# Altium PCB PCB2.PcbDoc
Units mil, origin at the board's own origin, x right, y up, seen from the top; angles counter-clockwise.
Board outline 7000 x 5000 mil, 4 copper layers (Top Layer, Internal Plane 1, Internal Plane 2, Bottom Layer), stack 18.2 mil thick; 35 components, 27 nets, 113 pads, 0 vias.
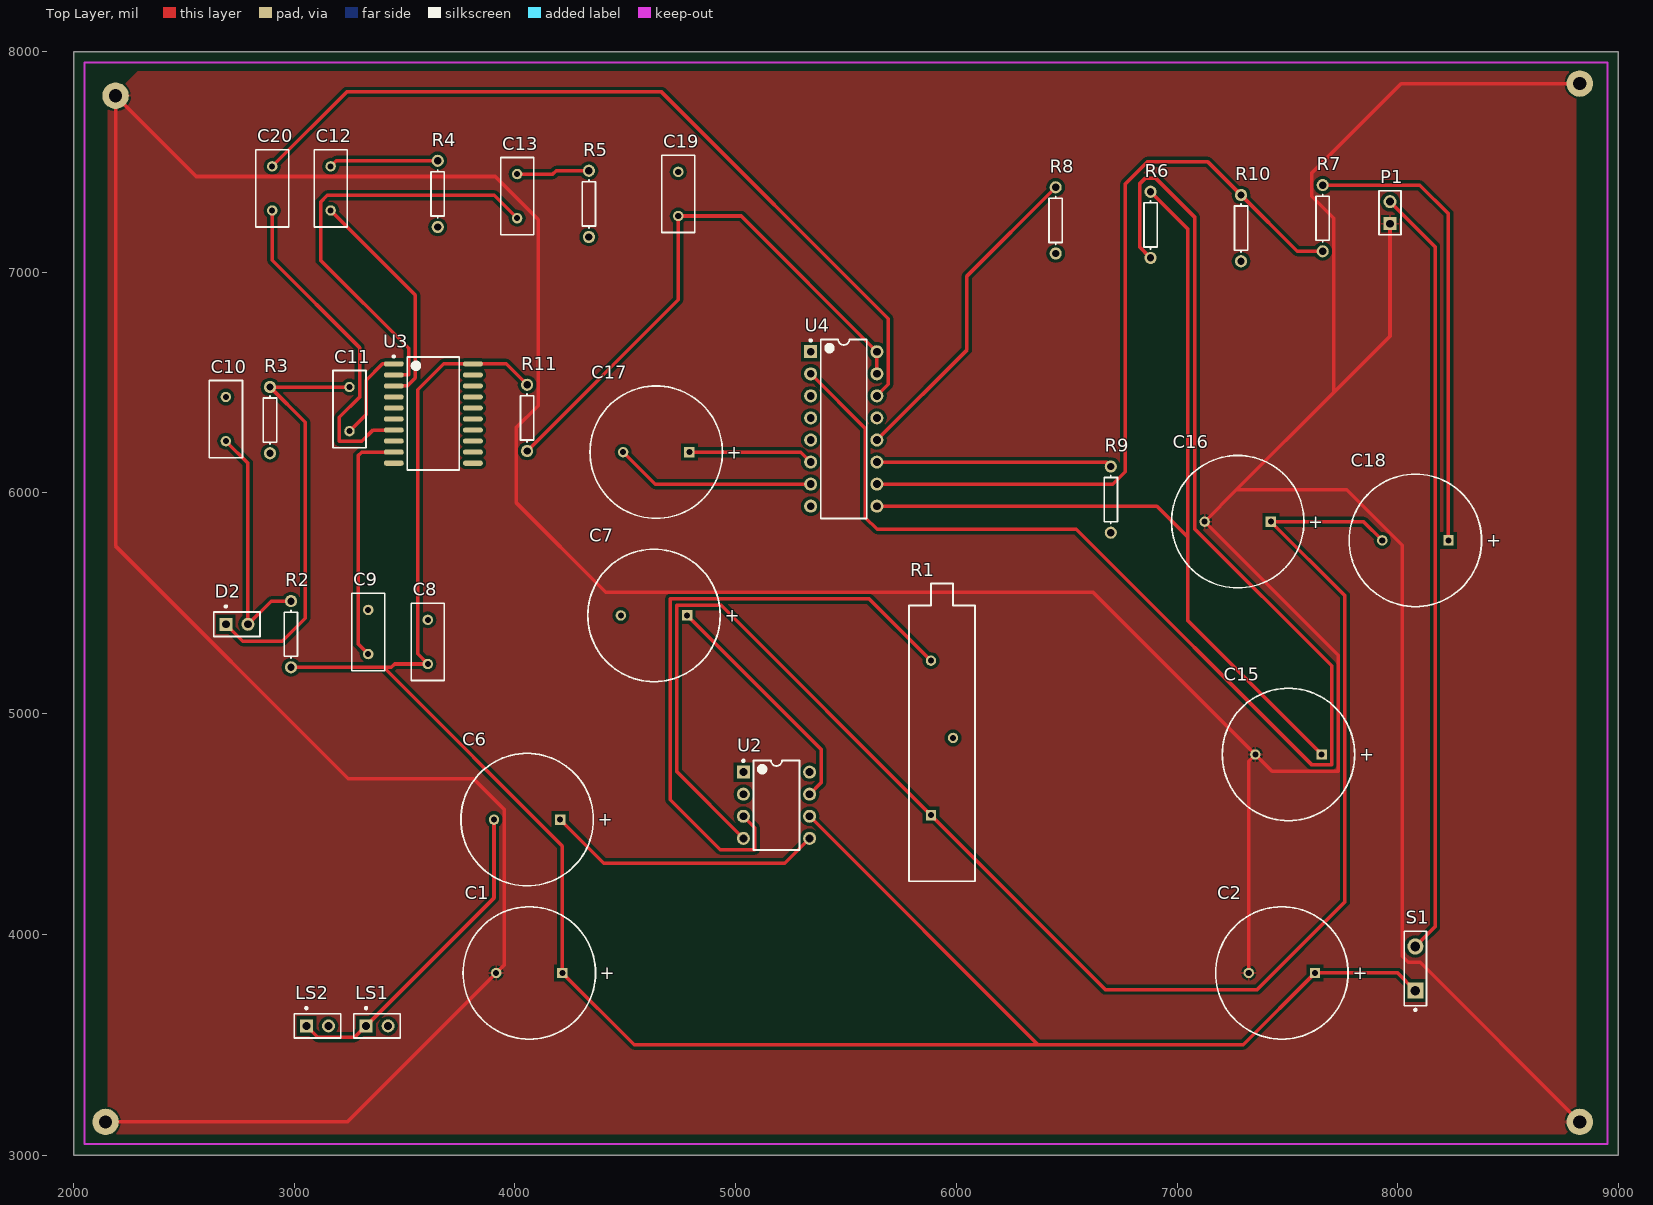
[diagram p0: Top Layer view]
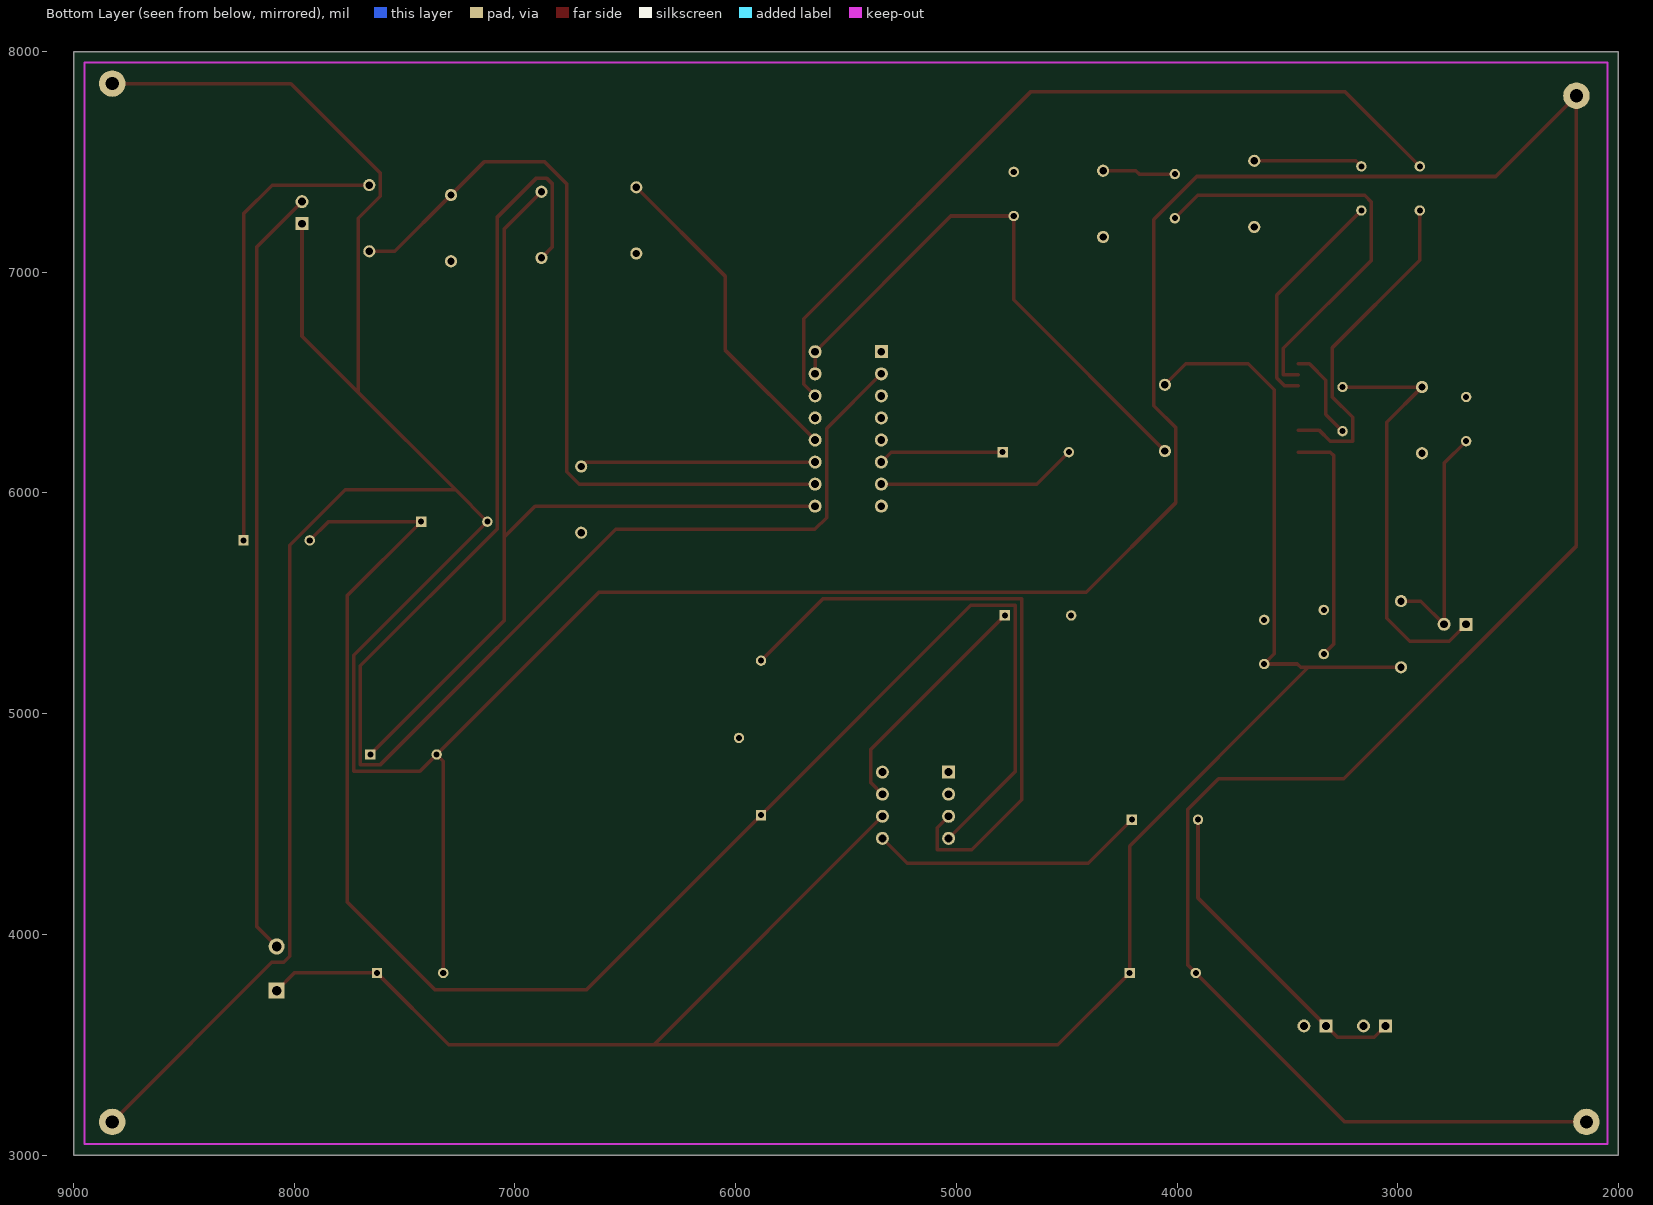
[diagram p1: Bottom Layer view, seen from below]
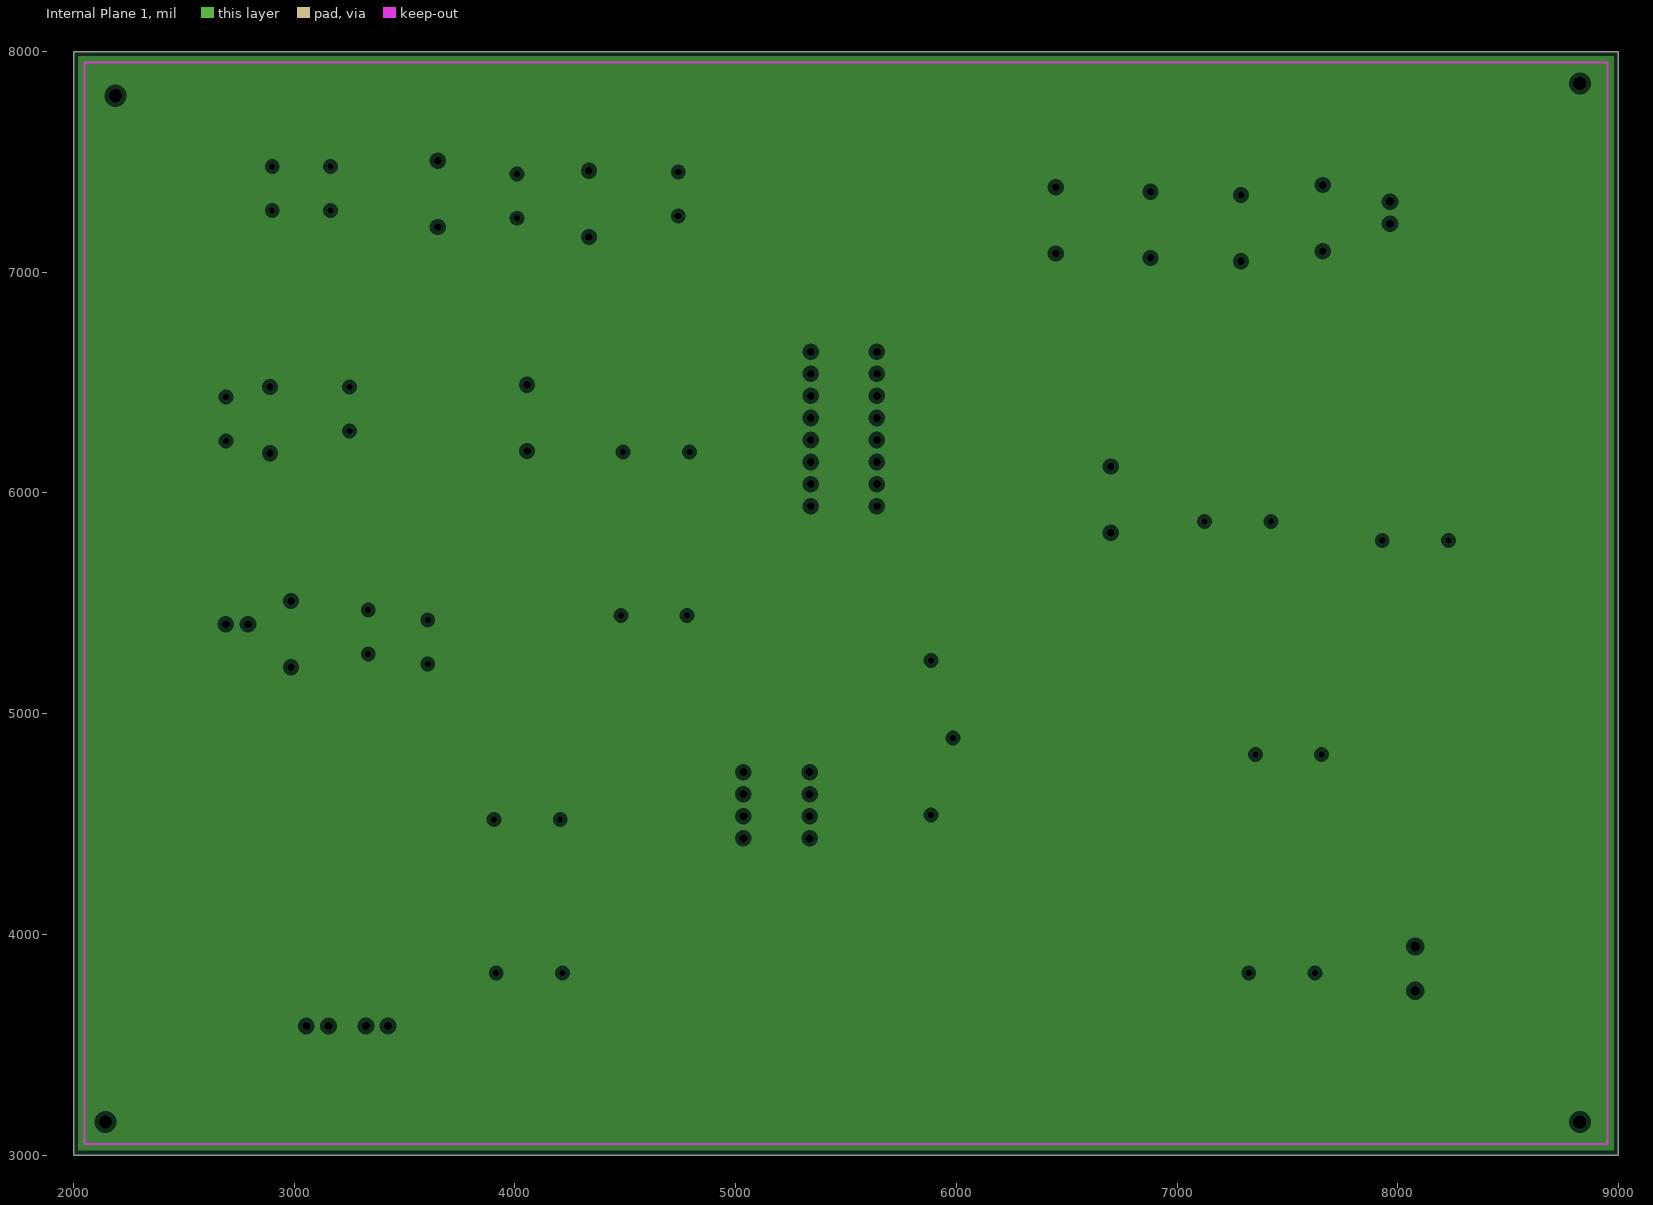
[diagram p2: Internal Plane 1, clearances drawn from the general rule]
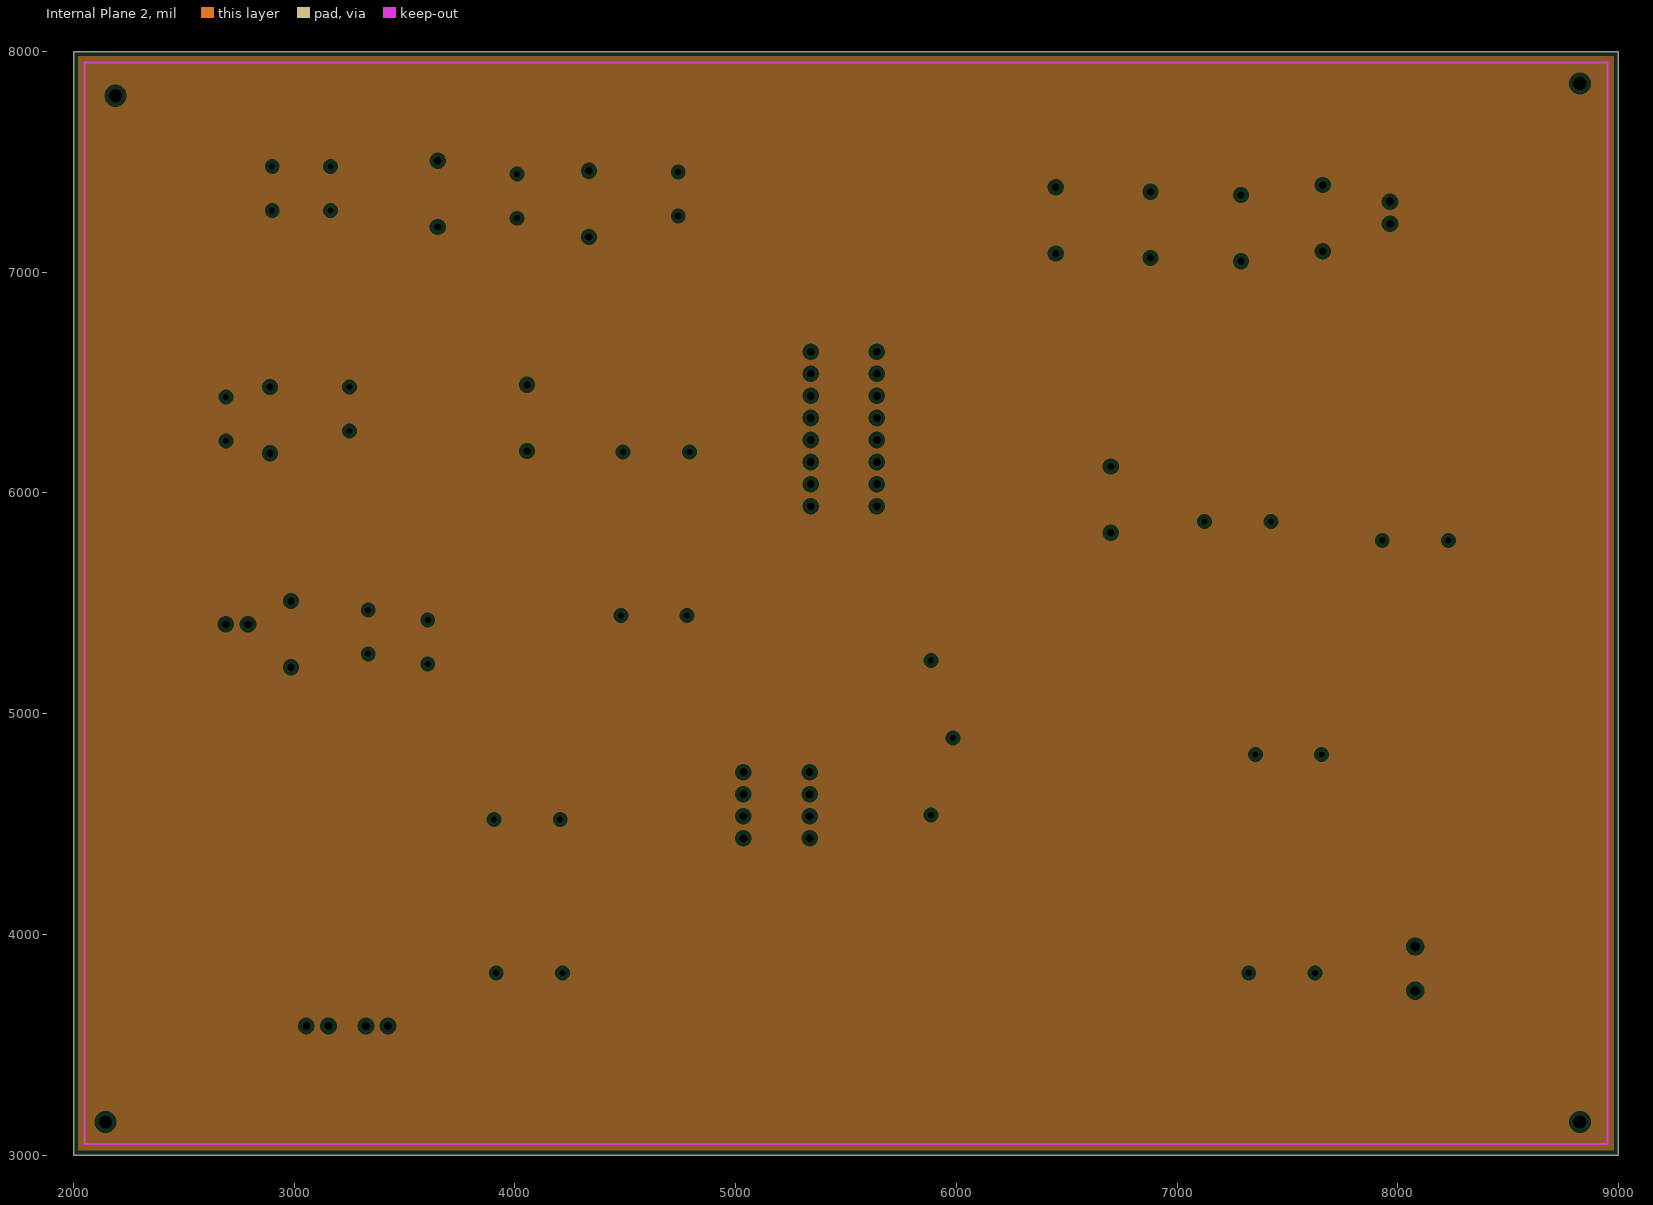
[diagram p3: Internal Plane 2, clearances drawn from the general rule]

## Layer stack, top to bottom
Top Solder: solder mask 0.4, Solder Resist, Dk 3.5
Top Layer: signal copper 1.4
Internal Plane 1: plane copper 1.4
Internal Plane 2: plane copper 1.4
Dielectric 1: dielectric 12.6, FR-4, Dk 4.8
Bottom Layer: signal copper 1.4
Bottom Solder: solder mask 0.4, Solder Resist, Dk 3.5

## Board outline
2000,3000 9000,3000 9000,8000 2000,8000

## Design rules (kind name [scope] priority, off if disabled: settings)
Clearance [All] p1: gap=14 ignorepadtopadclearanceinfootprint=FALSE
PlaneClearance [All] p1: clearance=20
PlaneConnect [All] p1: planeconnectstyle=Relief reliefexpansion=20 reliefentries=4 reliefconductorwidth=10 reliefairgap=10
PolygonConnect [All] p1: connectstyle=Relief reliefconductorwidth=10 reliefentries=4 polygonreliefangle="90 Angle" airgapwidth=10
RoutingVias [All] p1: holewidth=32 width=80 viastyle="Through Hole" minholewidth=28 minwidth=50 maxholewidth=28 maxwidth=50
SolderMaskExpansion [All] p1: expansion=4
Width [All] p1: maxlimit=16 minlimit=16 preferedwidth=16
28 further rules are at their usual default settings.

## Classes and differential pairs
component class PLL: C15 C16 C17 C18 R6 R7 R8 R9 R10 U4
component class M3005: C8 C9 C10 C11 C12 C13 C19 C20 D2 R2 R3 R4 R5 R11 U3
component class loud: LS1 LS2
component class LM386: C6 C7 R1 U2
component class BLOCINT: C1 C2 P1 S1

## Components (designator, comment, footprint, x,y, rotation, side; value= is the part's Value field where it differs from the comment)
C1 "Cap2" RB7.6-15 4065,3825 r0 top value=100pF
C2 "Cap2" RB7.6-15 7475,3825 r0 top value=100pF
C6 "Cap2" RB7.6-15 4055,4520 r0 top value=100pF
C7 "Cap2" RB7.6-15 4630,5445 r0 top value=10pF
C8 "Cap2" RAD-0.2 3605,5325 r90 top value=100pF
C9 "Cap2" RAD-0.2 3335,5370 r90 top value=100pF
C10 "Cap2" RAD-0.2 2690,6335 r90 top value=100pF
C11 "Cap2" RAD-0.2 3250,6380 r90 top value=100pF
C12 "Cap2" RAD-0.2 3165,7380 r90 top value=100pF
C13 "Cap2" RAD-0.2 4010,7345 r90 top value=100pF
C15 "Cap2" RB7.6-15 7505,4815 r0 top value=100pF
C16 "Cap2" RB7.6-15 7275,5870 r0 top value=100pF
C17 "Cap2" RB7.6-15 4640,6185 r0 top value=100pF
C18 "Cap2" RB7.6-15 8080,5785 r0 top value=100pF
C19 "Cap2" RAD-0.2 4740,7355 r90 top value=100pF
C20 "Cap2" RAD-0.2 2900,7380 r90 top value=100pF
D2 "Fil-3C" PIN2 2690,5405 r0 top
LS1 "Speaker" PIN2 3325,3585 r0 top
LS2 "Speaker" PIN2 3055,3585 r0 top
P1 "Header 2" HDR1X2 7965,7220 r90 top
R1 "Res Tap" VR3 5935,4890 r90 top value=1K
R2 "Res1" AXIAL-0.3 2985,5360 r90 top value=1K
R3 "Res1" AXIAL-0.3 2890,6330 r90 top value=1K
R4 "Res1" AXIAL-0.3 3650,7355 r90 top value=1K
R5 "Res1" AXIAL-0.3 4335,7310 r90 top value=1K
R6 "Res1" AXIAL-0.3 6880,7215 r90 top value=1K
R7 "Res1" AXIAL-0.3 7660,7245 r90 top value=1K
R8 "Res1" AXIAL-0.3 6450,7235 r90 top value=1K
R9 "Res1" AXIAL-0.3 6700,5970 r90 top value=1K
R10 "Res1" AXIAL-0.3 7290,7200 r90 top value=1K
R11 "Res1" AXIAL-0.3 4055,6340 r90 top value=1K
S1 "SW-SPST" SPST-2 8080,3845 r90 top
U2 "LM386N-4/NOPB" N08E 5185,4585 r0 top
U3 "M3005LD" SO20_N 3630,6360 r0 top
U4 "CD4046BCN" N16E 5490,6290 r0 top

## Footprints (in the part's own frame and the unit in brackets; to place one, negate y for a bottom-side part, rotate by r counter-clockwise, add the part's x,y. Pads: shape width x height; smd on the part's side, far side on the other; paste and mask are expansions set on the pad)
AXIAL-0.3 [mm] "Axial Device, Thru-Hole; 2 Leads; 0.3 in Pin Spacing"
  round 1.4 hole 0.85: 1(-3.81,0) 2(3.81,0)
  silkscreen extent -2.77,-0.76 2.77,0.76
HDR1X2 [mm] "Connector; Header; 2 Position"
  rect 1.5x1.5 hole 0.9: 1(0,0)
  round 1.5 hole 0.9: 2(2.54,0)
  silkscreen extent -1.27,-1.27 3.81,1.27
N08E [mm] "DIP, 8-Leads, Row Spacing 7.62mm, Pitch 2.54mm, Body 9.91x6.35mm"
  rect 1.5x1.5 hole 0.9: 1(-3.81,3.81)
  round 1.5 hole 0.9: 2(-3.81,1.27) 3(-3.81,-1.27) 4(-3.81,-3.81) 5(3.81,-3.81) 6(3.81,-1.27) 7(3.81,1.27) 8(3.81,3.81)
  silkscreen extent -3.93,-5.15 2.65,5.23, body extent -3.6,-5.15 3.6,5.15, height 5.34
N16E [mm] "DIP, 16-Leads, Row Spacing 7.62mm, Pitch 2.54mm, Body 19.3x6.35mm"
  rect 1.5x1.5 hole 0.9: 1(-3.81,8.89)
  round 1.5 hole 0.9: 2(-3.81,6.35) 3(-3.81,3.81) 4(-3.81,1.27) 5(-3.81,-1.27) 6(-3.81,-3.81) 7(-3.81,-6.35) 8(-3.81,-8.89) 9(3.81,-8.89) 10(3.81,-6.35) 11(3.81,-3.81) 12(3.81,-1.27) 13(3.81,1.27) 14(3.81,3.81) 15(3.81,6.35) 16(3.81,8.89)
  silkscreen extent -3.93,-10.3 2.65,10.31, body extent -3.6,-10.28 3.6,10.28, height 5.08
PIN2 [mm] "Photosensitive Diode; 2 Leads"
  rect 1.5x1.5 hole 0.9: 1(0,0)
  round 1.5 hole 0.9: 2(2.54,0)
  silkscreen extent -1.4,-1.4 3.94,2.17
RAD-0.2 [mm] "Radial Cap, Thru-Hole; 2 Leads; 0.2 in Pin Spacing"
  round 1.2 hole 0.7: 1(-2.54,0) 2(2.54,0)
  silkscreen extent -4.44,-1.91 4.44,1.91
RB7.6-15 [mm] "Polarized Capacitor (Radial); 2 Leads"
  rect 1.2x1.2 hole 0.7: 1(3.81,0)
  round 1.2 hole 0.7: 2(-3.81,0)
  silkscreen extent -7.62,-7.62 7.62,7.62
SO20_N [mm] "SOIC, 20-Leads, Body 12.8x7.5mm, Pitch 1.27mm, IPC Medium Density"
  oval 2.3x0.6 smd: 1(-4.55,5.715) 2(-4.55,4.445) 3(-4.55,3.175) 4(-4.55,1.905) 5(-4.55,0.635) 6(-4.55,-0.635) 7(-4.55,-1.905) 8(-4.55,-3.175) 9(-4.55,-4.445) 10(-4.55,-5.715) 11(4.55,-5.715) 12(4.55,-4.445) 13(4.55,-3.175) 14(4.55,-1.905) 15(4.55,-0.635) 16(4.55,0.635) 17(4.55,1.905) 18(4.55,3.175) 19(4.55,4.445) 20(4.55,5.715)
  silkscreen extent -4.67,-6.5 3,6.69, body extent -3.75,-6.4 3.75,6.4, height 2.65
SPST-2 [mm] "Switch; 2 Leads"
  rect 1.85x1.85 hole 1.1: 1(-2.54,0)
  round 1.85 hole 1.1: 2(2.54,0)
  silkscreen extent -4.89,-1.27 4.28,1.27
VR3 [mm] "Thru-Hole; 3 Leads"
  rect 1.2x1.2 hole 0.7: 1(-8.89,1.27)
  round 1.2 hole 0.7: 2(0,-1.27) 3(8.89,1.27)
  silkscreen extent -16.51,-3.81 17.78,3.81

## Part data
C1 C2 C6 C7 C8 C9 C10 C11 C12 C13 C15 C16 C17 C18 C19 C20: "Capacitor", PackageDescription="Capacitor; 2 Leads", PackageReference=CAPR5-4X5, Published=23-Sep-2002, Publisher="Altium Limited"
D2: library part "Photo Sen", "Photosensitive Diode", LatestRevisionDate=17-Jul-2002, LatestRevisionNote="Re-released for DXP Platform.", PackageReference=PIN2, Published=24-Mar-1999, Publisher="Altium Limited"
LS1 LS2: "Loudspeaker", LatestRevisionDate=17-Jul-2002, LatestRevisionNote="Re-released for DXP Platform.", PackageReference=PIN2, Published=24-Mar-1999, Publisher="Altium Limited"
P1: "Header, 2-Pin", LatestRevisionDate=17-Jul-2002, LatestRevisionNote="Re-released for DXP Platform.", Publisher="Altium Limited"
R1: "Tapped Resistor", LatestRevisionDate=17-Jul-2002, LatestRevisionNote="Re-released for DXP Platform.", PackageDescription="Variable Resistor, Thru-Hole; 3 Leads", PackageReference=VR3, Published=24-Mar-1999, Publisher="Altium Limited", Set Position=0.5, Sim Note="Enter the Resistance value and the set point into parameter fields."
R2 R3 R4 R5 R6 R7 R8 R9 R10 R11: "Resistor", LatestRevisionDate=17-Jul-2002, LatestRevisionNote="Re-released for DXP Platform.", PackageDescription="Axial Device, Thru-Hole; 2 Leads; 0.3 in Pin Spacing", PackageReference=AXIAL-0.3, Published=8-Jun-2000, Publisher="Altium Limited"
S1: "Single-Pole, Single-Throw Switch", LatestRevisionDate=17-Jul-2002, LatestRevisionNote="Re-released for DXP Platform.", PackageDescription="Switch; 2 Leads", PackageReference=SPST-2, Published=24-Mar-1999, Publisher="Altium Limited"
U2: "Low Voltage Audio Power Amplifier, 8-pin MDIP, Pb-Free", Manufacturer="National Semiconductor", PackageTopMarking=NSUZXYTTE#*LM*386N-4, PowerWise=N, Supplier Part Number 1=LM386N-4-ND, Code_JEDEC=MS-001-BA, ComponentLink1Description="LM386 Datasheet", ComponentLink1URL=http://www.national.com/ds/LM/LM386.pdf, ComponentLink2Description="LM386 Web Page", ComponentLink2URL=http://www.national.com/pf/LM/LM386.html, ComponentLink3Description="N08E Package Page", ComponentLink3URL=http://www.national.com/packaging/folders/n08e.html, CompType="Audio IC", DatasheetVersion=Aug-2000, PackageDescription="MDIP, .365 x .250 x .130in, 8 Lead, .100in Pitch", PackageReference=N08E, PackageVersion="revG, May-2006", PartNumber=LM386N-4/NOPB, PinCount=8, Published=1-Mar-2010, Publisher="Altium Limited", RoHS=Y, Supplier 1=Digi-Key, Supplier 2=Farnell, Supplier Part Number 2=1184987
U3: "Remote Control Transmitter", Code_IPC=SOIC127P1030-20, Code_JEDEC=MS-013-AC, ComponentLink1Description="Manufacturer Link", ComponentLink1URL=http://www.st.com/, DatasheetVersion=Jun-1992, LatestRevisionDate=13-Apr-2006, LatestRevisionNote="IPC-7351 Footprint Added.", PackageDescription="20-Pin Plastic Small Outline Integrated Circuit 1.27 mm Pitch", PackageReference=SO20, PackageVersion=Jul-2001, Published=24-Aug-2001, Publisher="Altium Limited"
U4: "Micropower Phase-Locked Loop", ComponentLink1Description="Manufacturer Link", ComponentLink1URL=http://www.fairchildsemi.com/, ComponentLink2Description=Datasheet, ComponentLink2URL=http://www.fairchildsemi.com/ds/CD%2FCD4046BC.pdf, DatasheetVersion=Jan-1999, LatestRevisionDate=04-Mar-2005, LatestRevisionNote="Stylized 3D Model Added.", PackageDescription="DIP, 16-Pin, Row Spacing 7.62 mm, Pitch 2.54 mm", PackageReference=N16E, PackageVersion=2000, Published=17-Jul-2002, Publisher="Altium Limited"

## Free pads (board coordinates)
  round 120 hole 60: 14(2190,7800) 15(8825,7855) 16(8825,3150) 17(2145,3150)

## Nets (pads, with @x,y where several pads share a name; then routed paths per layer and width w, separated by ;. In a path a pad name is that pad's centre, name@x,y a point inside that pad or via, vN(x,y) a via of type N, cw(c..) or ccw(c..) an arc to the next point about the centre after c; other vN are vias at no path point)
GND: C1.2 C2.2 C15.2 C16.2 P1.1 pad.14 pad.15 pad.16 pad.17 | length 25136.5
  Top Layer w16: pad.17 3240,3150 C1.2 3951,3861 3951,4566 3812,4705 3245,4705 2190,5760 pad.14 2556,7434 3910,7434 4105,7239 4105,6396 4005,6296 4005,5957 4411.38,5550.62 6619.38,5550.62 C15.2 ; C2.2 7325,4785 C15.2 ; P1.1 7965,6710 7710,6455 ; pad.16 8102,3873 8047,3873 8020,3900 8020,5763 7769,6014 7269,6014 ; pad.15 8015,7855 7610,7450 7610,7345 7710,7245 7710,6455 ; 7269,6014 C16.2 7730.62,5264.38 7730.62,4739.38 7430.62,4739.38 C15.2 ; 7269,6014 7710,6455
NetC1_1: C1.1 C2.1 C8.1 R2.1 R11.2 S1.1 U2.6 U3.20 | length 9823.3
  Top Layer w16: R2.1 3405,5210 ; R11.2 3960,6585 U3.20 3676.69,6585 3559,6467.31 3559,5271 C8.1 3455,5225 3440,5210 3405,5210 ; U2.6 6370,3500 ; S1.1 8000,3825 C2.1 7300,3500 6370,3500 ; 3405,5210 4215,4400 C1.1 4540,3500 6370,3500
NetC6_1: C6.1 U2.5 | length 1258.8
  Top Layer w16: C6.1 4403,4322 5222,4322 U2.5
NetC6_2: C6.2 LS1.1 LS2.1 | length 1488.3
  Top Layer w16: LS2.1 3107,3533 3273,3533 LS1.1 3905,4165 C6.2
NetC7_1: C7.1 U2.7 | length 1083
  Top Layer w16: C7.1 5387,4838 5387,4687 U2.7
NetC9_1: C9.1 U3.9 | length 1086.5
  Top Layer w16: C9.1 3289,5316 3289,6169 3305,6185 U3.9
NetC10_1: C10.1 D2.2 R2.2 | length 1109.9
  Top Layer w16: C10.1 2790,6135 D2.2 2895,5510 R2.2
NetC11_1: C11.1 U3.1 | length 418
  Top Layer w16: C11.1 3325.62,6355.62 3325.62,6510.62 3400,6585 U3.1
NetC11_2: C11.2 D2.1 R3.2 | length 1908.7
  Top Layer w16: D2.1 2767,5328 2945,5328 3050,5433 3050,6320 R3.2 C11.2
NetC12_1: C12.1 U3.3 | length 1029.8
  Top Layer w16: C12.1 3548.14,6896.86 3548.14,6521.19 3511.95,6485 U3.3
NetC12_2: C12.2 R4.2 | length 495.4
  Top Layer w16: C12.2 3190,7505 R4.2
NetC13_1: C13.1 U3.2 | length 1962.5
  Top Layer w16: U3.2 3518.14,6535 3518.14,6655.86 3119,7055 3119,7318 3150,7349 3906,7349 C13.1
NetC13_2: C13.2 R5.2 | length 331.2
  Top Layer w16: C13.2 4172,7445 4187,7460 R5.2
NetC15_1: C15.1 R6.2 U4.9 | length 4338.5
  Top Layer w16: U4.9 6909,5940 7049.38,5799.62 ; R6.2 7049.38,7195.62 7049.38,5799.62 ; C15.1 7049.38,5420.62 7049.38,5799.62
NetC16_1: C16.1 C18.2 R1.1 U2.4 | length 7495.1
  Top Layer w16: U2.4 4734,4736 4734,5490.62 4934.38,5490.62 R1.1 6675,3750 7364,3750 7761,4147 7761,5534 C16.1 7845,5870 C18.2
NetC17_1: C17.1 U4.6 | length 568.6
  Top Layer w16: C17.1 5295,6185 U4.6
NetC17_2: C17.2 U4.7 | length 910.1
  Top Layer w16: C17.2 4635,6040 U4.7
NetC18_1: C18.1 R7.2 | length 2103.8
  Top Layer w16: R7.2 8100,7395 8230,7265 C18.1
NetC19_1: C19.1 R11.1 U4.15 U4.16 | length 2603.5
  Top Layer w16: R11.1 4740,6875 C19.1 5025,7255 U4.16 U4.15
NetC20_1: C20.1 U3.7 | length 1515.8
  Top Layer w16: C20.1 2900,7054.62 3295.62,6659 3295.62,6434 3204,6342.38 3204,6234 3306,6234 3357,6285 U3.7
NetC20_2: C20.2 U4.14 | length 3727.9
  Top Layer w16: C20.2 3237,7817 4664,7817 5692,6789 5692,6492 U4.14
NetP1_2: P1.2 S1.2 | length 3496.4
  Top Layer w16: P1.2 8169,7116 8169,4034 S1.2
NetR1_3: R1.3 U2.3 | length 2858.4
  Top Layer w16: U2.3 5087,4483 5087,4383 4931,4383 4704,4610 4704,5520.62 5604.38,5520.62 R1.3
NetR6_1: R6.1 U4.2 | length 6756.9
  Top Layer w16: U4.2 5588,6292 5588,5888 5641,5835 6543.38,5835 7609,4769.38 7700.62,4769.38 7700.62,5216.38 7079.38,5837.62 7079.38,7250.62 6905,7425 6855,7425 6830,7400 6830,7115 R6.1
NetR7_1: R7.1 R10.2 U4.10 | length 3556.4
  Top Layer w16: U4.10 6709,6040 6765,6096 6765,7400 6865,7500 7140,7500 R10.2 7545,7095 R7.1
NetR8_2: R8.2 U4.12 | length 1480.5
  Top Layer w16: U4.12 6048,6648 6048,6983 R8.2
NetR9_2: R9.2 U4.11 | length 1068.3
  Top Layer w16: U4.11 6680,6140 R9.2
pads on no net: C7.2 C8.2 C9.2 C10.2 C19.2 LS1.2 LS2.2 R1.2 R3.1 R4.1 R5.1 R8.1 R9.1 R10.1 U2.1 U2.2 U2.8 U3.4 U3.5 U3.6 U3.8 U3.10 U3.11 U3.12 U3.13 U3.14 U3.15 U3.16 U3.17 U3.18 U3.19 U4.1 U4.3 U4.4 U4.5 U4.8 U4.13

## Polygon pours and split planes (outlines as drawn)
GND on Top Layer "Top Layer-No Net" (solid, remove dead copper, pour order 2): 2190,7810 2290,7910 8810,7910 8810,3145 8760,3095 2155,3095 2155,7810 2135,7830

## Keep-outs
Keep-Out Layer:
  lines w10: 2050,3050 2050,7950 8950,7950 8950,3050 2050,3050

## Silkscreen, mask and mechanical layers (free items; w line width, h text height)
Drill Drawing:
  text ".LEGEND" at 4255,3320 h60
  text "Drill Drawing." at 4255,3220 h60

## Dimensions
2050,3050 to 2050,7950 on Mechanical 1
2050,3050 to 8950,3050 on Mechanical 1

## Text inside footprints (layer, text, board x,y; h text height)
C1: Top Overlay "+" at 4385.15,3795.99 h59.06
C2: Top Overlay "+" at 7795.15,3795.99 h59.06
C6: Top Overlay "+" at 4375.15,4490.99 h59.06
C7: Top Overlay "+" at 4950.15,5415.99 h59.06
C15: Top Overlay "+" at 7825.15,4785.99 h59.06
C16: Top Overlay "+" at 7595.15,5840.99 h59.06
C17: Top Overlay "+" at 4960.15,6155.99 h59.06
C18: Top Overlay "+" at 8400.15,5755.99 h59.06